# Altium PCB PCB_esp32_kit.PcbDoc
Units mm, origin at the board's own origin, x right, y up, seen from the top; angles counter-clockwise.
Board outline 103.63 x 51.69 mm, 2 copper layers (Top Layer, Bottom Layer), stack 1.57 mm thick; 54 components, 50 nets, 200 pads, 21 vias.
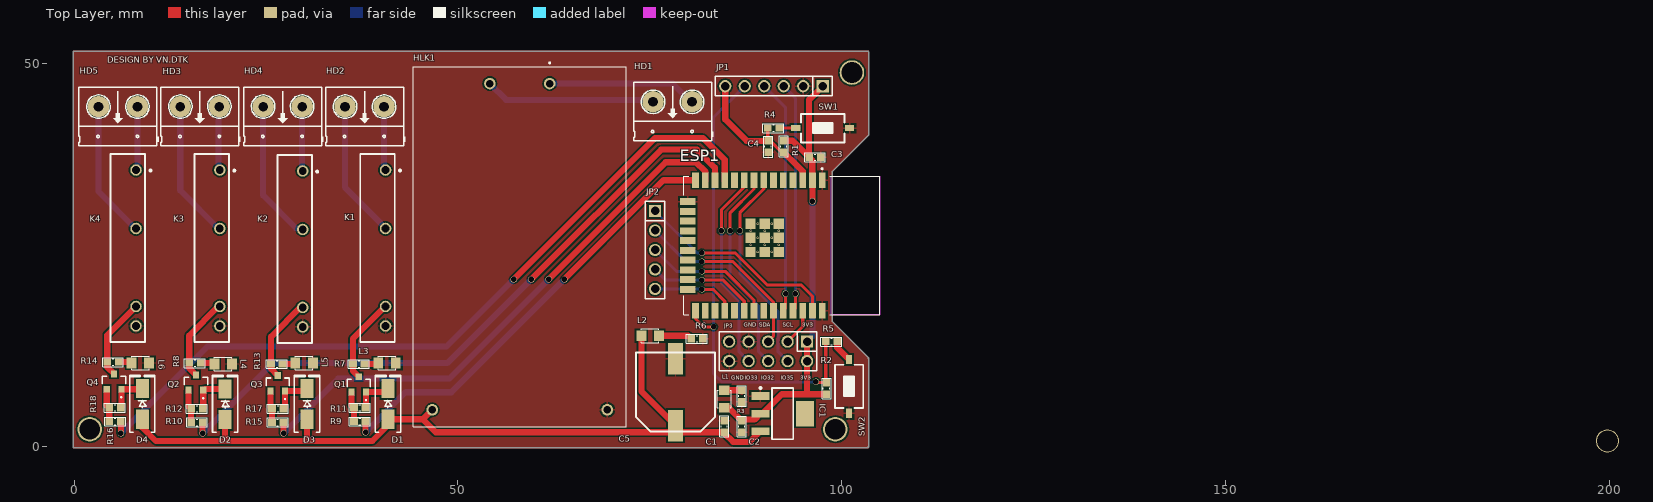
[diagram p0: Top Layer view]
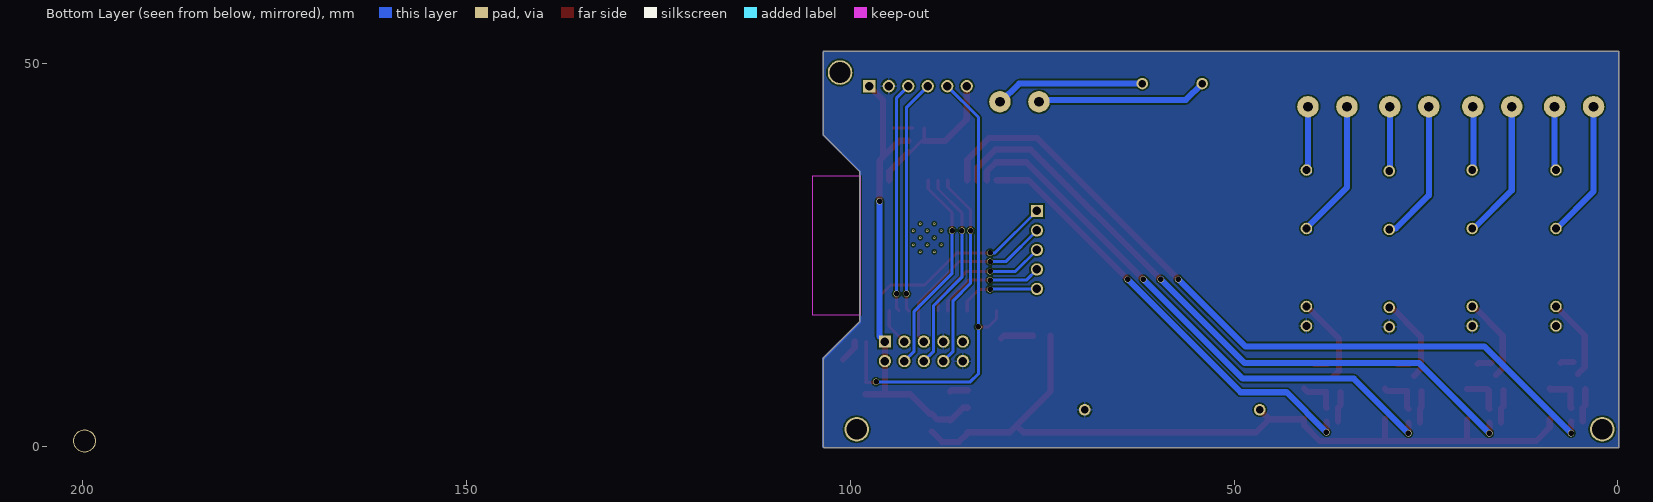
[diagram p1: Bottom Layer view, seen from below]
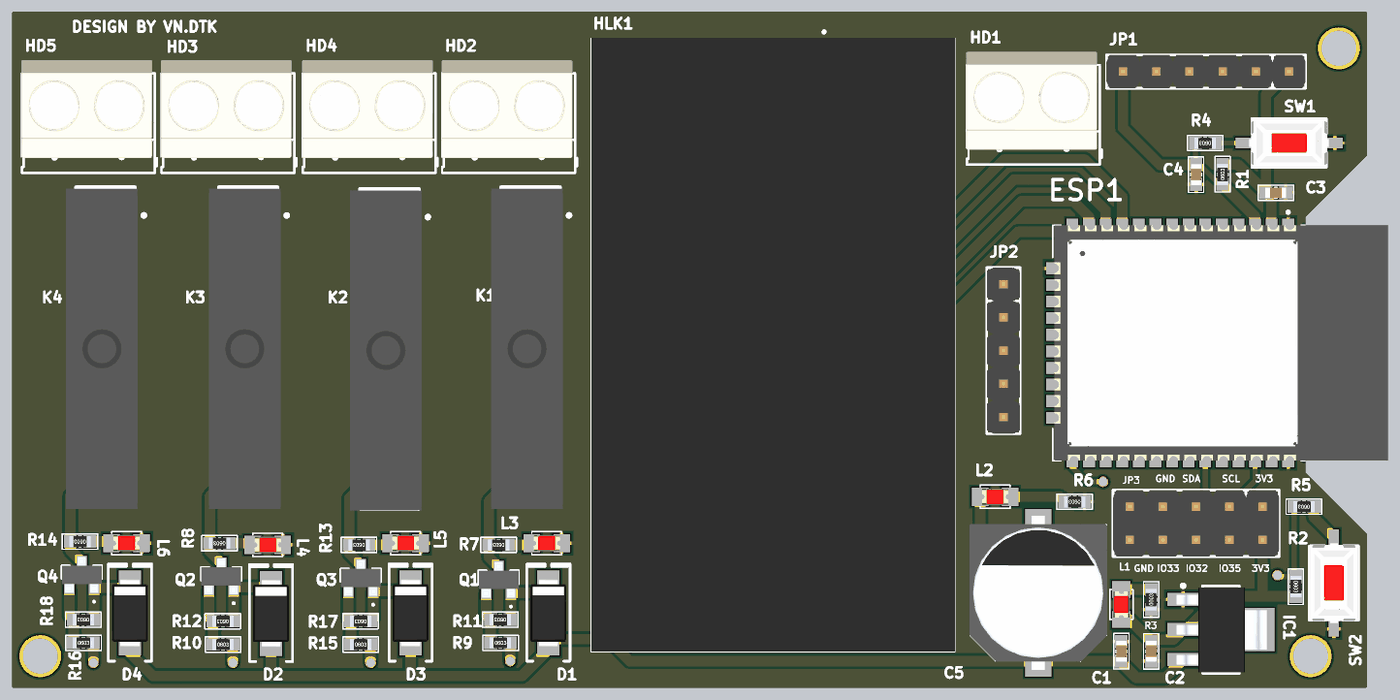
[diagram p2: 3D render of the assembled board from above, using the file's embedded part models]

## Layer stack, top to bottom
Top Solder: solder mask 0.01, Solder Resist, Dk 3.5
Top Layer: signal copper 0.035
Dielectric 1: dielectric 1.5, FR-4, Dk 4.8
Bottom Layer: signal copper 0.035
Bottom Solder: solder mask 0.01, Solder Resist, Dk 3.5

## Board outline
-0.127,0 -0.127,51.435 cw(c0,51.435) 0,51.562 103.378,51.562 cw(c103.378,51.435) 103.505,51.435 103.505,40.64 cw(c103.378,40.64) 103.468,40.549 98.806,35.888 98.806,16.309 103.468,11.647 cw(c103.379,11.557) 103.505,11.557 103.505,0 cw(c103.378,0) 103.378,-0.127 0,-0.127 cw(c0,0)

## Design rules (kind name [scope] priority, off if disabled: settings)
Clearance [All] p1: gap=0.2 ignorepadtopadclearanceinfootprint=FALSE
PolygonConnect [All] p1: connectstyle=Relief reliefconductorwidth=0.254 reliefentries=4 polygonreliefangle="90 Angle" airgapwidth=0.254
RoutingVias [All] p1: holewidth=0.3 width=0.6 viastyle="Through Hole" minholewidth=0.2 minwidth=0.4 maxholewidth=0.4 maxwidth=1
SolderMaskExpansion [All] p1: expansion=0.102
Width [All] p1: maxlimit=0.8 minlimit=0.2 preferedwidth=0.4
30 further rules are at their usual default settings.

## Components (designator, comment, footprint, x,y, rotation, side; value= is the part's Value field where it differs from the comment)
C1 "106" "tu 0603" 84.709,2.655 r90 top
C2 "106" "tu 0603" 86.995,2.667 r270 top
C3 "106" "tu 0603" 96.52,37.719 r0 top
C4 "105" "tu 0603" 90.424,39.116 r270 top
C5 "1000uF" "tu nhom 10 (G)" 78.359,7.128 r90 top
D1 "M7" "DIODE SMA" 40.894,5.588 r90 top
D2 "M7" "DIODE SMA" 19.685,5.556 r90 top
D3 "M7" "DIODE SMA" 30.353,5.588 r90 top
D4 "M7" "DIODE SMA" 8.89,5.588 r90 top
ESP1 "ESP32 WROOM 32" ESP32-WROOM-32D 92.213,26.235 r270 top
HD1 "Header 2" HED2 80.518,44.958 r180 top
HD2 "Header 2" HED2 40.386,44.323 r180 top
HD3 "Header 2" HED2 18.923,44.323 r180 top
HD4 "Header 2" HED2 29.718,44.323 r180 top
HD5 "Header 2" HED2 8.255,44.323 r180 top
HLK1 "HI-LINK_5V_5W" HLK10M05 61.969,47.326 r270 top
IC1 "LM1117" SOT223-4N 92.329,4.318 r0 top value=LM317
JP1 "JP 1x6 2.54" "JP 1x6 DT" 97.536,46.99 r180 top
JP2 "JP 1x5 2.54" "JP 1x5 DT" 75.692,30.734 r270 top
JP3 "JP 2x5 2.54" "JP 2x5 DT" 90.424,12.446 r180 top
K1 "G3MB202DC5" G3MC-201PL 41.783,25.908 r90 top
K2 "G3MB202DC5" G3MC-201PL 30.988,25.781 r90 top
K3 "G3MB202DC5" G3MC-201PL 20.193,25.908 r90 top
K4 "G3MB202DC5" G3MC-201PL 9.271,25.908 r90 top
L1 "LED 0805" LED-0805-Red 84.709,5.096 r90 top
L2 "LED 0805" LED-0805-Red 73.914,14.478 r0 top
L3 "LED 0805" LED-0805-Red 39.624,10.922 r0 top
L4 "LED 0805" LED-0805-Red 18.288,10.795 r0 top
L5 "LED 0805" LED-0805-Red 28.829,10.922 r0 top
L6 "LED 0805" LED-0805-Red 7.493,10.922 r0 top
Q1 "SS8550" SS8550 37.084,8.128 r90 top
Q2 "SS8550" SS8550 15.875,8.382 r90 top
Q3 "SS8550" SS8550 26.543,8.271 r90 top
Q4 "SS8550" SS8550 5.207,8.509 r90 top
R1 "10k" "tro smd 0603" 92.456,39.128 r90 top
R2 "10k" "tro smd 0603" 98.044,7.608 r270 top
R3 "330R" "tro smd 0603" 86.995,6.604 r90 top
R4 "470R" "tro smd 0603" 91.123,41.529 r180 top
R5 "470R" "tro smd 0603" 98.679,13.716 r180 top
R6 "1k" "tro smd 0603" 81.141,14.097 r180 top
R7 "1k" "tro smd 0603" 37.096,10.795 r180 top
R8 "1k" "tro smd 0603" 15.748,10.922 r180 top
R9 "10k" "tro smd 0603" 37.223,3.302 r0 top
R10 "10k" "tro smd 0603" 16.002,3.175 r0 top
R11 "10k" "tro smd 0603" 37.223,5.08 r180 top
R12 "10k" "tro smd 0603" 16.002,4.953 r180 top
R13 "1k" "tro smd 0603" 26.416,10.795 r180 top
R14 "1k" "tro smd 0603" 5.08,11.049 r180 top
R15 "10k" "tro smd 0603" 26.531,3.175 r0 top
R16 "10k" "tro smd 0603" 5.334,3.302 r0 top
R17 "10k" "tro smd 0603" 26.543,4.953 r180 top
R18 "10k" "tro smd 0603" 5.334,5.08 r180 top
SW1 "SW" SW1-SMD 97.536,41.529 r180 top value="SW chip 2 pin"
SW2 "SW" SW1-SMD 100.965,7.874 r90 top value="SW chip 2 pin"

## Footprints (in the part's own frame and the unit in brackets; to place one, negate y for a bottom-side part, rotate by r counter-clockwise, add the part's x,y. Pads: shape width x height; smd on the part's side, far side on the other; paste and mask are expansions set on the pad)
"DIODE SMA" [mm] "SMA"
  rect 2.5x1.7 smd: 1(-2,0) 2(2,0)
  silkscreen extent -3.68,-1.65 3.75,1.65, body extent -2.6,-1.37 2.6,1.37, height 2.4
ESP32-WROOM-32D [mm]
  rect 2x0.9 smd: 1(-8.5,5.26) 2(-8.5,3.99) 3(-8.5,2.72) 4(-8.5,1.45) 5(-8.5,0.18) 6(-8.5,-1.09) 7(-8.5,-2.36) 8(-8.5,-3.63) 9(-8.5,-4.9) 10(-8.5,-6.17) 11(-8.5,-7.44) 12(-8.5,-8.71) 13(-8.5,-9.98) 14(-8.5,-11.25) 25(8.5,-11.25) 26(8.5,-9.98) 27(8.5,-8.71) 28(8.5,-7.44) 29(8.5,-6.17) 30(8.5,-4.9) 31(8.5,-3.63) 32(8.5,-2.36) 33(8.5,-1.09) 34(8.5,0.18) 35(8.5,1.45) 36(8.5,2.72) 37(8.5,3.99) 38(8.5,5.26)
  rect 0.9x2 smd: 15(-5.715,-12.25) 16(-4.445,-12.25) 17(-3.175,-12.25) 18(-1.905,-12.25) 19(-0.635,-12.25) 20(0.635,-12.25) 21(1.905,-12.25) 22(3.175,-12.25) 23(4.445,-12.25) 24(5.715,-12.25)
  rect 1.33x1.33 smd: 39(-2.835,-0.405) 39(-2.835,-2.24) 39(-2.835,-4.075) 39(-1,-0.405) 39(-1,-2.24) 39(-1,-4.075) 39(0.835,-0.405) 39(0.835,-2.24) 39(0.835,-4.075)
  round 0.3 hole 0.2: 39(-2.835,-1.322) 39(-2.835,-3.157) 39(-1.917,-0.405) 39(-1.917,-2.24) 39(-1.917,-4.075) 39(-1,-1.322) 39(-1,-3.157) 39(-0.082,-0.405) 39(-0.082,-2.24) 39(-0.082,-4.075) 39(0.835,-1.322) 39(0.835,-3.157)
  Keep-Out Layer region: 9,6.45 -9,6.45 -9,12.75 9,12.75
  Keep-Out Layer region: 9,6.45 -9,6.45 -9,12.75 9,12.75
  silkscreen extent -10.1,-12.75 9,12.75, body extent -9,-12.62 9,12.88, height 3.2
G3MC-201PL [mm]
  round 1.5 hole 1: 1(10.16,1.2) 2(2.54,1.2) 3(-7.62,1.2) 4(-10.16,1.2)
  silkscreen extent -12.25,-0.82 12.25,4.5, body extent -12.37,-0.23 12.13,5.27, height 24.43
HED2 [mil] "Header 2, 2 pin, hight 300mil, Pin to Pin 200, Colour Green"
  round 110 hole 50: 1(0,0) 2(200,0)
  silkscreen extent -106,-100 300,200, body extent -92,-140 302,155, height 394
HLK10M05 [mm]
  round 1.5 hole 1: 1(0,0) 2(0,-7.8) 3(42.5,7.5) 4(42.5,-15.3)
  silkscreen extent -2.8,-17.8 44.7,10, body extent -2.23,-17.8 44.67,10, height 21.9
"JP 1x5 DT" [mm] "5 pins, 1 row, straight, gold plating"
  rect 1.6x1.6 hole 1.1: 1(0,0)
  round 1.6 hole 1.1: 2(2.54,0) 3(5.08,0) 4(7.62,0) 5(10.16,0)
  silkscreen extent -1.27,-1.27 11.43,1.27, body extent -1.27,-1.27 11.43,1.27, height 8.54
"JP 1x6 DT" [mm] "6 pins, 1 row, straight, gold plating"
  rect 1.6x1.6 hole 1.1: 1(0,0)
  round 1.6 hole 1.1: 2(2.54,0) 3(5.08,0) 4(7.62,0) 5(10.16,0) 6(12.7,0)
  silkscreen extent -1.27,-1.27 13.97,1.27, body extent -1.27,-1.27 13.97,1.27, height 8.54
"JP 2x5 DT" [mm] "10 pins, dual pin, straight, gold plating"
  rect 1.6x1.6 hole 1.1: 1(-5.08,-1.27)
  round 1.6 hole 1.1: 2(-2.54,-1.27) 3(0,-1.27) 4(2.54,-1.27) 5(5.08,-1.27) 6(5.08,1.27) 7(2.54,1.27) 8(0,1.27) 9(-2.54,1.27) 10(-5.08,1.27)
  silkscreen extent -6.35,-2.54 6.35,2.54, body extent -6.35,-2.54 6.35,2.54, height 8.55
LED-0805-Red [mil]
  rect 50x55 smd: 1(0,0) 2(90,0)
  silkscreen extent 0,-35 90,35, body extent 5,-25 85,25, height 43
SOT223-4N [mm] "SOT223, 4-Leads, Body 6.5x3.5mm, Pitch 2.3mm, Lead Span 7mm, IPC Medium Density"
  rect 2.4x1 smd: 1(-2.9,2.3) 2(-2.9,0) 3(-2.9,-2.3)
  rect 2.4x3.3 smd: 4(2.9,0)
  silkscreen extent -3.02,-3.35 1.4,3.47, body extent -3.39,-3.27 3.5,3.23, height 1.72
SS8550 [mm]
  rect 0.9x0.8 smd: 1(-1,-0.95) 2(-1,0.95) 3(1,0)
  silkscreen extent -2.1,-1.52 0.7,1.52, body extent -1.37,-1.52 1.37,1.52, height 1.21
SW1-SMD [mm]
  rect 1.2x0.8 smd: 1(-3.5,0) 2(3.5,0)
  silkscreen extent -2.82,-1.85 2.82,1.85, body extent -3.05,-1.85 3.05,1.85, height 2.5
"tro smd 0603" [mm] "Chip Capacitor, 2-Leads, Body 1,60x0,80mm, IPC Medium Density"
  rect 1x0.95 smd mask+0.076: 1(-0.75,0) 2(0.75,0)
  silkscreen extent -1.35,-0.58 1.37,0.58, body extent -0.82,-0.42 0.82,0.43, height 0.44
"tu 0603" [mm] "Chip Capacitor, 2-Leads, Body 1,60x0,80mm, IPC Medium Density"
  rect 1x0.95 smd mask+0.076: 1(-0.75,0) 2(0.75,0)
  silkscreen extent -1.35,-0.58 1.37,0.58, body extent -0.8,-0.4 0.8,0.4, height 0.9
"tu nhom 10 (G)" [mm]
  rect 4.1x2 smd: 1(-4.35,0) 2(4.35,0)
  silkscreen extent -5.15,-5.15 5.15,5.15, body extent -5.9,-5.25 5.9,5.25, height 10.5

## Part data
C1 C2 C3: library part "Tu 0603 106 16V 20%", "Dán", Chung_Loai=Dán, Don_Vi=Con, Ma_Hang=MH004848, So_Chan=2, Ten_Linh_Kien="T? 0603-10uF 20% 16V"
C4: library part "Tu 0603 105 50V 10%", "Dán", Chung_Loai=Dán, Don_Vi=Con, Ma_Hang=MH004569, So_Chan=2, Ten_Linh_Kien="T? 0603 105-1uF 50V 10%"
C5: library part "Tu Nhom 1000uF 10V", "Dán", Chung_Loai=Dán, Don_Vi=Con, Ma_Hang=MH007515, So_Chan=2, Ten_Linh_Kien="T? Nhôm 1000uF 10V"
D1 D2 D3 D4: library part "Diode M7 ( 4007 )", "Dán", Chung_Loai=Dán, Don_Vi=Con, Ma_Hang=MH000944, Ten_Linh_Kien="Diode M7 1N4007 SMD 1A 1000V"
HD1 HD2 HD3 HD4 HD5: library part Hed2, "Header 2 (Green)"
HLK1: "Integrated Circuit", Manufacturer_Name="Advanced Monolithic Systems", Manufacturer_Part_Number=ams1117-3.3v, Datasheet Link=http://www.advanced-monolithic.com/pdf/ds1117.pdf, Height=1.8mm
IC1: "3v3"
JP1: library part "JP 1x6 2.54 Duc Thang", "C?m", Chung_Loai=C?m, Don_Vi=Con, Ma_Hang=MH000903, Ten_Linh_Kien="Jump Ðon Ð?c 2.54MM 1x40P Th?ng 11MM"
JP2: library part "JP 1x5 2.54 Duc Thang", "C?m", Chung_Loai=C?m, Don_Vi=Con, Ma_Hang=MH000903, Ten_Linh_Kien="Jump Ðon Ð?c 2.54MM 1x40P Th?ng 11MM"
JP3: library part "JP 2x5 2.54 Duc Thang", "C?m", Chung_Loai=C?m, Don_Vi=Con, Ma_Hang=MH002686, Ten_Linh_Kien="Jump Ðôi Ð?c 2.54MM 2x40P Th?ng 11MM"
K1 K2 K3 K4: library part G3MB-202P-DC5_1, "Relay or Contactor", Manufacturer_Name="Omron Electronics", Manufacturer_Part_Number="G3MB-202P-4 DC5", Mouser Part Number=653-G3MB-202P4DC5, Datasheet Link="https://componentsearchengine.com/Datasheets/1/G3MB-202P-4 DC5.pdf", Height=20.5mm, Mouser Price/Stock=https://www.mouser.co.uk/ProductDetail/Omron-Automation-and-Safety/G3MB-202P-4-DC5?qs=Z0CfnKMjtWg7MIsv3RC0Aw%3D%3D
L1 L2 L3 L4 L5 L6: library part "LED 0805 Do", "Dán", Chung_Loai=Dán, Don_Vi=Con, Ma_Hang=MH000897, Ten_Linh_Kien="LED 0805 Màu Ð? (Red)"
Q1 Q2 Q3 Q4: "Transistor BJT PNP", Manufacturer_Name="Formosa Microsemi", Datasheet Link=https://datasheet.lcsc.com/szlcsc/1903281702_Formosa-Microsemi-SS8550_C341553.pdf, Height=1.11mm, Manufacturer_Part_Number=SS8550
R1 R2 R9 R10 R11 R12 R15 R16 R17 R18: library part "Tro 0603 5% 10k", "Dán", Chung_Loai=Dán, Don_Vi=Con, Ma_Hang=MH006316, So_Chan=2, Ten_Linh_Kien="Tr? 0603 5% 10k"
R3: library part "Tro 0603 5% 330R", "Dán", Chung_Loai=Dán, Don_Vi=Con, Ma_Hang=MH006910, So_Chan=2, Ten_Linh_Kien="Tr? 0603 5% 330R"
R4 R5: library part "Tro 0603 5% 470R", "Dán", Chung_Loai=Dán, Don_Vi=Con, Ma_Hang=MH006328, So_Chan=2, Ten_Linh_Kien="Tr? 0603 5% 470R"
R6 R7 R8 R13 R14: library part "Tro 0603 5% 1k", "Dán", Chung_Loai=Dán, Don_Vi=Con, Ma_Hang=MH006319, So_Chan=2, Ten_Linh_Kien="Tr? 0603 5% 1k"
SW1 SW2: library part SW2, "Switch button 2 pin"

## Free pads (board coordinates)
  round 3.2 hole 2.7: 42(2.032,2.286) 42(99.187,2.286) 42(101.346,48.768)
  round 3 hole 2.7: 42(199.771,0.774)

## Via types
v1: diameter 0.8, hole 0.711, Top Layer to Bottom Layer, 21 vias

## Nets (pads, with @x,y where several pads share a name; then routed paths per layer and width w, separated by ;. In a path a pad name is that pad's centre, name@x,y a point inside that pad or via, vN(x,y) a via of type N, cw(c..) or ccw(c..) an arc to the next point about the centre after c; other vN are vias at no path point)
EN: C4.1 ESP1.3 JP1.6 R1.1 R4.2 | length 20.1
  Top Layer w0.4: R4.2 90.373,39.917 C4.1 90.69,39.866 92.178,38.378 R1.1
  Top Layer w0.8: JP1.6 84.836,42.672 87.642,39.866 C4.1 ; R1.1 94.933,35.901 ESP1.3
GND: C1.2 C2.2 C3.2 C4.2 C5.2 ESP1.1 ESP1.15 ESP1.38 HLK1.3 IC1.1 JP1.2 JP3.4 JP3.6 K1.4 K2.4 K3.4 K4.4 L3.2 L4.2 L5.2 L6.2 R3.1 R6.1 SW1.1 SW2.1
IO0: ESP1.25 JP1.5 R2.1 R5.2 | length 63.6
  Top Layer w0.4: ESP1.25 80.963,16.7 82.042,15.621 v1(83.312,15.621) ; v1(96.647,8.473) 96.762,8.358 R2.1 97.929,8.473 R5.2 R5.2@97.917,13.728
  Bottom Layer w0.4: JP1.5 83.312,42.926 v1(83.312,15.621) 83.312,9.525 84.364,8.473 v1(96.647,8.473)
IO12: ESP1.14 R9.2 | length 58
  Top Layer w0.8: v1(37.973,1.905) R9.2 ; v1(63.881,21.827) 76.789,34.735 ESP1.14
  Bottom Layer w0.8: v1(37.973,1.905) 43.18,7.112 49.166,7.112 v1(63.881,21.827)
IO14: ESP1.13 R15.2 | length 72.6
  Top Layer w0.8: R15.2 27.281,1.802 v1(27.305,1.778) ; v1(61.849,21.844) 61.849,21.861 77.072,37.084 81.026,37.084 82.233,35.877 ESP1.13
  Bottom Layer w0.8: v1(27.305,1.778) 34.417,8.89 48.895,8.89 v1(61.849,21.844)
IO26: ESP1.11 R16.2 | length 100
  Top Layer w0.8: R16.2 6.096,3.29 v1(6.096,1.778) ; v1(57.277,21.827) 75.709,40.259 81.915,40.259 84.773,37.401 ESP1.11
  Bottom Layer w0.8: v1(6.096,1.778) 17.399,13.081 48.531,13.081 v1(57.277,21.827)
IO27: ESP1.12 R10.2 | length 86.1
  Top Layer w0.8: R10.2 16.752,1.79 v1(16.764,1.778) ; v1(59.563,21.827) 76.471,38.735 81.153,38.735 83.503,36.385 ESP1.12
  Bottom Layer w0.8: v1(16.764,1.778) 25.908,10.922 48.641,10.922 v1@59.554,21.835
IO32: ESP1.8 JP3.8 | length 26.9
  Top Layer w0.4: v1(85.471,28.152) 85.471,30.48 88.583,33.592 ESP1.8
  Bottom Layer w0.4: v1(85.471,28.152) 85.471,22.098 89.154,18.415 89.154,12.446 JP3.8
IO33: ESP1.9 JP3.7 | length 26.3
  Top Layer w0.4: v1(84.328,28.152) 84.328,30.861 87.313,33.846 ESP1.9
  Bottom Layer w0.4: v1(84.328,28.152) 84.328,21.336 86.614,19.05 86.614,12.446 JP3.7
IO35: ESP1.7 JP3.9 | length 27.4
  Top Layer w0.4: v1(86.741,28.152) 86.741,30.48 89.853,33.592 ESP1.7
  Bottom Layer w0.4: v1(86.741,28.152) 86.741,22.606 91.694,17.653 91.694,12.446 JP3.9
MISO: ESP1.31 JP2.3 | length 17
  Top Layer w0.4: v1(81.788,22.86) 84.836,22.86 88.583,19.113 ESP1.31
  Bottom Layer w0.4: JP2.3 78.486,22.86 v1(81.788,22.86)
MOSI: ESP1.37 JP2.1 | length 27
  Top Layer w0.4: v1(81.788,25.273) 86.106,25.273 90.297,21.082 94.742,21.082 96.203,19.621 ESP1.37
  Bottom Layer w0.4: JP2.1 81.153,25.273 v1(81.788,25.273)
NetD1_2: D1.2 Q1.1 R11.1 | length 5.1
  Top Layer w0.8: R11.1 38.034,5.141 Q1.1 40.434,7.128 D1.2
NetD2_2: D2.2 Q2.1 R12.1 | length 5.4
  Top Layer w0.8: R12.1 16.825,5.026 Q2.1 16.999,7.556 D2.2
NetD3_2: D3.2 Q3.1 R17.1 | length 5.4
  Top Layer w0.8: R17.1 27.493,5.153 Q3.1 30.036,7.271 D3.2
NetD4_2: D4.2 Q4.1 R18.1 | length 5.2
  Top Layer w0.8: R18.1 6.157,5.153 Q4.1 8.811,7.509 D4.2
NetHD1_1: HD1.1 HLK1.1 | length 19.5
  Bottom Layer w0.8: HLK1.1 78.023,47.326 HD1.1@80.454,44.895
NetHD1_2: HD1.2 HLK1.2 | length 22.1
  Bottom Layer w0.8: HLK1.2 56.283,45.212 HD1.2@75.438,45.212
NetHD2_1: HD2.1 K1.1 | length 8.6
  Bottom Layer w0.8: K1.1@40.259,35.814 40.386,35.941 HD2.1
NetHD2_2: HD2.2 K1.2 | length 18.2
  Bottom Layer w0.8: HD2.2 35.306,33.782 40.259,28.829 K1.2@40.259,28.194
NetHD3_1: HD3.1 K3.1 | length 8.3
  Bottom Layer w0.8: K3.1@18.796,36.068 18.796,44.196 HD3.1
NetHD3_2: HD3.2 K3.2 | length 17.9
  Bottom Layer w0.8: HD3.2 13.843,33.401 K3.2@18.796,28.448
NetHD4_1: HD4.1 K2.1 | length 8.3
  Bottom Layer w0.8: K2.1@29.591,36.068 29.718,36.195 HD4.1
NetHD4_2: HD4.2 K2.2 | length 18.3
  Bottom Layer w0.8: HD4.2 24.638,32.766 28.956,28.448 K2.2@29.591,28.448
NetHD5_1: HD5.1 K4.1 | length 8.3
  Bottom Layer w0.8: K4.1 8.255,36.252 HD5.1
NetHD5_2: HD5.2 K4.2 | length 17.9
  Bottom Layer w0.8: HD5.2 3.175,33.274 8.001,28.448 K4.2
NetK1_3: K1.3 Q1.3 R7.2 | length 10.8
  Top Layer w0.8: Q1.3 36.346,9.866 R7.2 36.346,14.121 K1.3@40.259,18.034
NetK2_3: K2.3 Q3.3 R13.2 | length 11
  Top Layer w0.8: Q3.3 25.666,10.148 R13.2 25.666,14.363 K2.3@29.591,18.288
NetK3_3: K3.3 Q2.3 R8.2 | length 10.8
  Top Layer w0.8: Q2.3 14.998,10.259 R8.2 14.998,14.49 K3.3@18.796,18.288
NetK4_3: K4.3 Q4.3 R14.2 | length 10.7
  Top Layer w0.8: Q4.3 4.33,10.386 R14.2 4.33,14.547 K4.3
NetL1_2: L1.2 R3.2 | length 2.4
  Top Layer w0.8: L1.2 86.84,7.382 R3.2@86.995,7.227
NetL2_2: L2.2 R6.2 | length 4.3
  Top Layer w0.8: L2.2 80.01,14.478 R6.2
NetL3_1: L3.1 R7.1 | length 1.8
  Top Layer w0.8: R7.1 39.497,10.795 L3.1
NetL4_1: L4.1 R8.1 | length 1.8
  Top Layer w0.8: R8.1 18.161,10.922 L4.1
NetL5_1: L5.1 R13.1 | length 1.7
  Top Layer w0.8: R13.1 28.702,10.795 L5.1
NetL6_1: L6.1 R14.1 | length 1.7
  Top Layer w0.8: R14.1 7.366,11.049 L6.1
NetQ1_2: Q1.2 R9.1 R11.2 | length 4
  Top Layer w0.8: Q1.2 36.134,5.419 R11.2 R9.1
NetQ2_2: Q2.2 R10.1 R12.2 | length 4.3
  Top Layer w0.8: Q2.2 14.925,5.28 R12.2 R10.1
NetQ3_2: Q3.2 R15.1 R17.2 | length 4.2
  Top Layer w0.8: Q3.2 25.593,5.153 R17.2 25.793,3.187 R15.1
NetQ4_2: Q4.2 R16.1 R18.2 | length 4.3
  Top Layer w0.8: Q4.2 4.257,5.407 R18.2 R16.1
NetR4_1: R4.1 SW1.2 | length 2.6
  Top Layer w0.4: R4.1 SW1.2@94.429,41.529
NetR5_1: R5.1 SW2.2 | length 3
  Top Layer w0.8: R5.1 99.429,12.91 SW2.2
RST: ESP1.28 JP2.5 | length 11
  Top Layer w0.4: v1(81.788,20.52) 83.239,20.52 84.773,18.986 ESP1.28
  Bottom Layer w0.4: JP2.5 81.734,20.574 v1(81.788,20.52)
RX: ESP1.34 JP1.4 | length 30.5
  Top Layer w0.4: ESP1.34 92.71,18.052 v1(92.71,19.939)
  Bottom Layer w0.4: JP1.4 92.71,44.196 v1(92.71,19.939)
SCK: ESP1.30 JP2.4 | length 14.6
  Top Layer w0.4: v1(81.788,21.717) 84.582,21.717 87.313,18.986 ESP1.30
  Bottom Layer w0.4: JP2.4 77.089,21.717 v1(81.788,21.717)
SCL: ESP1.36 JP3.2 | length 4.8
  Top Layer w0.4: JP3.2 94.933,15.685 ESP1.36
SDA: ESP1.33 JP2.2 JP3.3 | length 24.7
  Top Layer w0.4: v1(81.788,24.13) 85.852,24.13 91.123,18.859 ESP1.33 91.123,14.415 JP3.3
  Bottom Layer w0.4: JP2.2 79.756,24.13 v1(81.788,24.13)
TX: ESP1.35 JP1.3 | length 30
  Top Layer w0.4: ESP1.35 93.98,18.052 v1(93.98,19.939)
  Bottom Layer w0.4: JP1.3 93.98,45.466 v1(93.98,19.939)
VCC3V3: C2.1 C3.1 ESP1.2 IC1.2 JP1.1 JP3.1 JP3.10 L1.1 R1.2 R2.2 | length 61
  Top Layer w0.8: L1.1 85.316,5.096 C2.1 ; C2.1@86.995,3.544 88.655,3.544 IC1.2 89.678,4.318 92.218,6.858 95.631,6.858 ; R1.2 93.611,39.878 C3.1 ; JP3.1 JP3.10 95.504,6.985 95.631,6.858 ; v1(96.203,32.004) ESP1.2 96.17,34.768 96.17,37.319 C3.1 ; JP1.1 95.77,45.224 C3.1 ; R2.2 95.631,6.858
  Bottom Layer w0.8: JP3.1 96.203,14.415 v1(96.203,32.004)
VDD5V: C1.1 C5.1 D1.1 D2.1 D3.1 D4.1 HLK1.4 IC1.3 L2.1 | length 107.5
  Top Layer w0.8: D4.1 8.89,2.54 10.668,0.762 19.685,0.762 ; D2.1 19.685,0.762 ; D3.1 30.353,0.762 ; HLK1.4 45.431,3.588 ; L2.1 73.914,7.223 C5.1 ; IC1.3 88.046,0.635 85.852,0.635 84.709,1.778 C1.1 79.232,1.905 C5.1 ; 19.685,0.762 30.353,0.762 ; 30.353,0.762 38.862,0.762 40.894,2.794 D1.1 45.431,3.588 ; 45.431,3.588 47.114,1.905 77.486,1.905 C5.1
pads on no net: ESP1.4 ESP1.5 ESP1.6 ESP1.10 ESP1.16 ESP1.17 ESP1.18 ESP1.19 ESP1.20 ESP1.21 ESP1.22 ESP1.23 ESP1.24 ESP1.26 ESP1.27 ESP1.29 ESP1.32 ESP1.39 IC1.4 JP3.5

## Polygon pours and split planes (outlines as drawn)
no net on Bottom Layer "Bottom Layer-No Net 1" (solid, remove dead copper, pour order 34): -0.127,-0.127 103.403,-0.127 103.569,0.038 103.569,11.547 98.806,16.309 98.806,35.888 103.505,40.587 103.505,51.562 -0.127,51.562
GND on Bottom Layer "bottom Layer-No Net" (solid, pour order 33): -0.127,0 -0.127,51.435 cw(c0,51.435) 0,51.562 103.378,51.562 cw(c103.378,51.435) 103.505,51.435 103.505,40.64 cw(c103.378,40.64) 103.468,40.549 98.806,35.888 98.806,16.309 103.468,11.647 cw(c103.379,11.557) 103.505,11.557 103.505,0 cw(c103.378,0) 103.378,-0.127 0,-0.127 cw(c0,0)
no net on Bottom Layer "Bottom Layer-No Net" (solid, remove dead copper, pour order 30): -0.127,-0.127 103.505,-0.127 103.505,11.176 103.632,11.303 98.679,16.256 98.679,35.814 103.505,40.64 103.505,51.562 -0.127,51.562
GND on Top Layer "Top Layer-No Net1" (solid, pour order 39): -0.127,0 -0.127,51.435 cw(c0,51.435) 0,51.562 103.378,51.562 cw(c103.378,51.435) 103.505,51.435 103.505,40.64 cw(c103.378,40.64) 103.468,40.549 98.806,35.888 98.806,16.309 103.468,11.647 cw(c103.379,11.557) 103.505,11.557 103.505,0 cw(c103.378,0) 103.378,-0.127 0,-0.127 cw(c0,0)
no net on Top Layer "Top Layer-No Net" (solid, remove dead copper, pour order 37): -0.127,-0.127 103.505,-0.127 103.505,11.557 98.806,16.256 98.806,35.941 103.505,40.64 103.505,51.562 -0.127,51.562

## Silkscreen, mask and mechanical layers (free items; w line width, h text height)
Top Overlay:
  text "DESIGN BY VN.DTK" at 4.318,50.038 h0.8
  text "GND" at 87.249,15.621 h0.5
  text "SDA" at 89.281,15.621 h0.5
  text "SCL" at 92.329,15.621 h0.5
  text "3V3" at 94.869,15.621 h0.5
  text "GND" at 85.598,8.763 h0.5
  text "IO33" at 87.376,8.763 h0.5
  text "IO32" at 89.554,8.763 h0.5
  text "IO35" at 92.075,8.763 h0.5
  text "3V3" at 94.615,8.763 h0.5

## Text inside footprints (layer, text, board x,y; h text height)
ESP1: Mechanical 13 "ANTENNA" at 101.213,32.235 h1.78 r270